# Altium PCB PCB1.pcbdoc (part 2 of 2)
Units mil, origin at the board's own origin, x right, y up, seen from the top; angles counter-clockwise.
Board outline 826.77 x 2007.87 mil, 4 copper layers (Top Layer, Inner1, Inner2, Bottom Layer), stack 62.447 mil thick; 60 components, 78 nets, 305 pads, 176 vias.
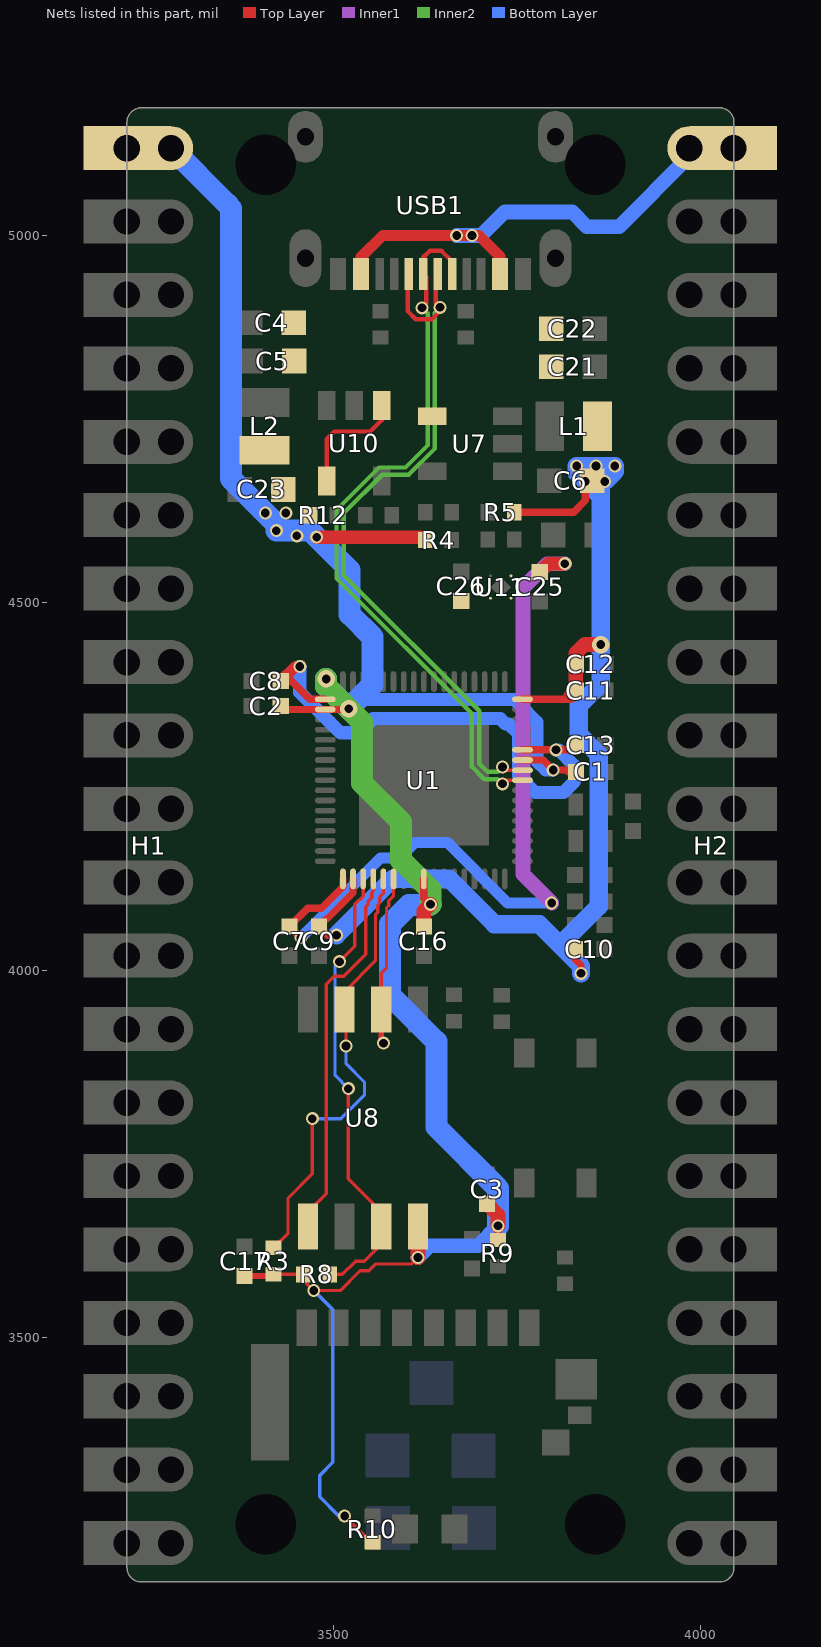
[diagram p4: the nets of this part, all layers, seen from the top]

## Via types
v1: diameter 17.7, hole 11.8, Top Layer to Bottom Layer, 172 vias
v2: diameter 24, hole 12, Top Layer to Bottom Layer, 3 vias
v3: diameter 17.7, hole 7.9, Top Layer to Bottom Layer, 1 vias

## Nets (pads, with @x,y where several pads share a name; then routed paths per layer and width w, separated by ;. In a path a pad name is that pad's centre, name@x,y a point inside that pad or via, vN(x,y) a via of type N, cw(c..) or ccw(c..) an arc to the next point about the centre after c; other vN are vias at no path point) (continued)
SPI0-HOLD: R8.2 U1.37 U8.7 | length 626.6
  Top Layer w4.5: R8.2@3495.5,3585.5 3512.5,3585.5 3530.5,3603.5 3542.5,3603.5 3565.5,3626.5 U8.7@3565.5,3650.86 3565.5,3670.5 3520.5,3715.5 v1(3520.5,3838.5) ; v1(3508.5,4011.5) 3529.5,4032.5 3529.5,4089.5 3540.82,4100.82 U1.37@3540.82,4124.19
  Bottom Layer w4.5: v1(3508.5,4011.5) 3502.5,4005.5 3502.5,3856.5 v1(3520.5,3838.5)
SPI0-MISO: U1.40 U8.2 | length 231.8
  Top Layer w4.5: U8.2@3565.5,3946.14 3565.5,3995.5 3572.5,4002.5 3572.5,4084.5 3575.5,4087.5 3575.5,4094.5 3582.16,4101.16 U1.40@3582.16,4124.19
  Top Layer w8: U8.2@3565.5,3946.14 3565.5,3903.5 v1(3568.5,3900.5)
SPI0-MOSI: U1.38 U8.5 | length 517.9
  Top Layer w4.5: U8.5@3465.5,3650.86 3465.5,3670.5 3490.5,3695.5 3490.5,3980.5 3501.5,3991.5 3514.5,3991.5 3544.5,4021.5 3544.5,4086.5 3547.5,4089.5 3547.5,4093.5 3552.5,4098.5 3552.5,4105.5 3554.6,4107.6 U1.38@3554.6,4124.19
SPI0-WP: R3.1 U1.39 U8.3 | length 610
  Top Layer w4.5: R3.1@3418.5,3621.5 3438.5,3641.49 3438.5,3689.5 3471.5,3722.5 v1(3471.5,3797.5) ; v1(3517.5,3896.5) 3517.5,3944.14 U8.3@3515.5,3946.14 3515.5,3970.5 3557.5,4012.5 3557.5,4075.5 3560.5,4078.5 3560.5,4088.5 3563.5,4091.5 3563.5,4099.5 3568.38,4104.38 U1.39@3568.38,4124.19
  Bottom Layer w4.5: v1(3471.5,3797.5) 3510.5,3797.5 3542.5,3829.5 3542.5,3847.5 3517.5,3872.5 v1(3517.5,3896.5)
USB-DM: U1.60 USB1.A7 USB1.B7 | length 996.3
  Top Layer w4.5: v1(3730.5,4253.5) 3735.5,4258.5 U1.60@3757.81,4258.5
  Top Layer w6: v1(3621,4902) 3626.5,4907.5 3626.5,4944.15 USB1.A7@3622.66,4947.99 3622.66,4970.65 3631.5,4979.5 3647.59,4979.5 3662.03,4964.98 USB1.B7@3662.03,4947.99
  Inner2 w6: v1(3621,4902) 3628.5,4894.5 3628.5,4714.5 3598.5,4684.5 3562.5,4684.5 3504.5,4626.5 3504.5,4533.36 3688.91,4348.95 3688.91,4276.95 3705.86,4260 3724,4260 v1(3730.5,4253.5)
USB-DP: U1.61 USB1.A6 USB1.B6 | length 999.7
  Top Layer w4.5: v1(3730.5,4276.5) 3734.72,4272.28 U1.61@3757.81,4272.28
  Top Layer w6: USB1.B6@3602.97,4947.99 3601.26,4946.28 3601.26,4897.74 3612.5,4886.5 3634.5,4886.5 3645.5,4897.5 v1(3645.5,4902.5) 3639.5,4908.5 3639.5,4945.15 USB1.A6@3642.34,4947.99
  Inner2 w6: v1(3645.5,4902.5) 3638.5,4895.5 3638.5,4710.36 3602.64,4674.5 3566.64,4674.5 3514.5,4622.36 3514.5,4537.5 3698.91,4353.09 3698.91,4281.09 3710,4270 3724,4270 v1(3730.5,4276.5)
VBUS: C4.2 C5.2 C21.2 C22.2 H2.20 U7.4 U10.1 U10.4 USB1.A4B9 USB1.B4A9 | length 811.6
  Top Layer w6: U10.4@3491.1,4666.31 3491.1,4723.1 3501.5,4733.5 3550.5,4733.5 3565.9,4748.9 U10.1@3565.9,4768.69
  Top Layer w15: USB1.B4A9@3538.01,4947.99 3538.01,4971.01 3567.5,5000.5 v1(3668.21,5000.5) v1(3688.98,5000.5) 3698.5,5000.5 3726.99,4972.02 USB1.A4B9@3726.99,4947.99
  Bottom Layer w20: v1(3668.21,5000.5) v1(3688.98,5000.5) 3701.5,5000.5 3733.5,5032.5 3825.5,5032.5 3845.5,5012.5 3889.5,5012.5 3985.21,5108.21 H2.20@3985.21,5119.5
VCC-1V8: C8.2 C13.2 U1.18 U1.63 | length 755.8
  Top Layer w10: C8.2@3428.51,4393.5 3443.5,4393.5 3468.26,4368.74 U1.18@3489.19,4368.74 ; U1.63@3757.81,4299.84 v1(3803.36,4299.84) 3828.56,4299.84 C13.2@3830.51,4301.78
  Top Layer w15: C8.2@3428.51,4393.5 3448.5,4413.49 v1(3454.51,4413.49)
  Bottom Layer w18: v1(3454.51,4413.49) 3454.51,4378.49 3509.77,4323.23 3535.23,4323.23 3554.5,4342.5 3727.5,4342.5 3735.03,4334.97 3739.34,4334.97 3752.5,4321.81 3752.5,4264.5 3775.22,4241.78 3813.5,4241.78 3828.5,4256.78 3828.5,4278.5 3807.16,4299.84 v1(3803.36,4299.84)
VCC-3V3: C1.2 C2.2 C3.1 C16.2 C17.2 C23.2 C26.2 H1.1 L2.2 R3.2 R4.2 R8.1 R9.2 R10.2 R12.2 U1.19 U1.43 U1.62 U8.8 U11.3 U11.4 | length 3492
  Top Layer w4.5: R3.2@3418.5,3585.5 R8.1@3459.5,3585.5 3459.5,3577.5 v1(3473.5,3563.5) 3509.5,3563.5 3536.5,3590.5 3548.5,3590.5 3557.5,3599.5 3606.5,3599.5 v1(3615.5,3608.5)
  Top Layer w5: v1(3515.5,3256.5) 3551.5,3220.5 R10.2@3553.5,3220.5
  Top Layer w8: C17.2@3379.22,3583.51 3416.51,3583.51 R3.2@3418.5,3585.5
  Top Layer w10: C2.2@3428.51,4359.5 3433.05,4354.96 U1.19@3489.19,4354.96 3520.08,4354.96 v2(3521.08,4355.96) ; U1.43@3623.5,4124.19 3623.5,4098.47 v1(3632.5,4089.47) ; R9.2@3724.4,3632.34 v1(3724.4,3651.5) ; U1.62@3757.81,4286.06 3785.94,4286.06 v1(3799.5,4272.5) 3817.5,4272.5 3820.22,4269.78 C1.2@3830.51,4269.78
  Top Layer w18: v1(3477.5,4589.5) 3621.49,4589.5 R4.2@3625.5,4585.5
  Top Layer w20: v1(3615.5,3608.5) U8.8@3615.5,3650.86 ; C16.2@3623.5,4059.51 3623.5,4080.47 v1(3632.5,4089.47) ; C3.1@3709.5,3681.51 3724.4,3666.6 v1(3724.4,3651.5)
  Inner2 w30: v2(3490.44,4396.5) 3490.44,4386.59 v2(3521.08,4355.96) 3539.5,4337.54 3539.5,4254.5 3592.5,4201.5 3592.5,4149.5 3632.5,4109.5 v1(3632.5,4089.47)
  Bottom Layer w5: v1(3473.5,3563.5) 3499.5,3537.5 3499.5,3329.5 3481.5,3311.5 3481.5,3282.5 3507.5,3256.5 v1(3515.5,3256.5)
  Bottom Layer w18: 3533.62,4368.5 3746.5,4368.5 3777.5,4337.5 3777.5,4284.5 3789.5,4272.5 v1(3799.5,4272.5)
  Bottom Layer w20: v1(3615.5,3608.5) 3631.5,3624.5 3697.4,3624.5 v1(3724.4,3651.5)
  Bottom Layer w30: H1.1@3279.03,5119.5 3279.5,5119.5 3356.5,5042.5 ; 3360.5,5037.5 3360.5,4669.5 v1(3407.5,4622.5) 3422.5,4607.5 v1(3422.5,4598.5) 3468.5,4598.5 v1(3477.5,4589.5) 3522.5,4544.5 3522.5,4484.5 3553.5,4453.5 3553.5,4388.38 3533.62,4368.5 v2(3521.08,4355.96) 3490.44,4386.59 v2(3490.44,4396.5) ; v1(3632.5,4089.47) 3631.53,4088.5 3603.5,4088.5 3577.5,4062.5 3577.5,3965.5 3640.5,3902.5 3640.5,3786.5 3724.4,3702.6 v1(3724.4,3651.5)
  other v1: 3450.5,4591.5 3435.5,4622.5
VCC-PSRAM: C7.2 C25.2 U1.35 U11.1 | length 1112
  Top Layer w10: v1(3455.93,4044.07) C7.2@3440.5,4059.51 3465.14,4084.15 3484.15,4084.15 3513.26,4113.26 U1.35@3513.26,4124.19
  Top Layer w18: C25.2@3781.28,4541.91 3792.87,4553.5 v1(3815.5,4553.5)
  Inner1 w20: v1(3797.5,4091.34) 3758.5,4130.34 3758.5,4520.5 3791.5,4553.5 v1(3815.5,4553.5)
  Bottom Layer w15: v1(3455.93,4044.07) 3564.36,4152.5 3590.5,4152.5 3611.5,4173.5 3655.5,4173.5 3737.66,4091.34 v1(3797.5,4091.34)
VDD-SYS: C6.2 C9.2 C10.2 C11.2 C12.2 L1.2 R5.2 U1.36 U1.68 | length 1734.8
  Top Layer w10: v1(3504.5,4047.5) 3492.51,4047.5 C9.2@3480.5,4059.51 3490.49,4069.5 3491.5,4069.5 3527.04,4105.04 U1.36@3527.04,4124.19 ; R5.2@3746.5,4623.5 3827.5,4623.5 3843.47,4639.47 v1(3843.47,4665.5) ; U1.68@3757.81,4368.74 3818.74,4368.74 C11.2@3823.49,4373.5 ; C10.2@3829.49,4028.5 3829.49,4014.36 3837.5,4006.35 v1(3837.5,3995.5)
  Top Layer w20: C11.2@3823.49,4373.5 C11.2@3830.49,4380.5 C12.2@3830.49,4416.5 3830.49,4431.49 3842.5,4443.5 v2@3864.5,4443.5
  Bottom Layer w25: v1(3504.5,4047.5) 3576.81,4119.81 ; 3579.5,4122.5 3581.5,4124.5 3657.5,4124.5 3719.5,4062.5 3780.46,4062.5 3807.46,4035.5 ; v1(3837.5,3995.5) 3837.5,4005.46 3807.46,4035.5 ; 3807.46,4035.5 3810.5,4035.5 3861.5,4086.5 3861.5,4293.5 3834.5,4320.5 3834.5,4360.5 3864.5,4390.5 v2(3864.5,4443.29) 3864.5,4644.47 ; v1(3843.47,4665.5) v1@3864.5,4665.5 ; v1(3843.47,4665.5) 3831.5,4677.47 v1(3831.5,4686.5) v1(3857.84,4686.5) v1(3883.55,4686.5) ; v1(3843.47,4665.5) 3864.5,4644.47 ; 3864.5,4644.47 v1@3864.5,4665.5 ; v1@3864.5,4665.5 v1(3869.81,4665.5) 3883.55,4679.24 v1(3883.55,4686.5) ; v1@3864.5,4665.5 3864.5,4667.45 v1(3883.55,4686.5)
pads on no net: SW1.2 SW1.3 USB1.14

## Polygon pours and split planes (outlines as drawn)
GND on Top Layer (solid, remove dead copper, pour order 2): 3016.5,5317.5 3016.5,3014.5 4253.5,3014.5 4253.5,5317.5
GND on Inner1 (solid, remove dead copper): 3021,5316 3021,3013 4258,3013 4258,5316
GND on Inner2 (solid, remove dead copper): 3008,5303 3008,3000 4245,3000 4245,5303
GND on Bottom Layer (solid, remove dead copper, pour order 2): 3000,5324 3000,3021 4237,3021 4237,5324

## Keep-outs
Board Outline Layer:
  the board outline again, w1

## Other copper
Top Layer:
  drawing of 308 lines, arcs and shapes, not listed
Inner1:
  region net SPI0-CS0: 3864.97,3855.2 3861.44,3858.73 3861.86,3859.66 3862.29,3861.41 3862.66,3863.65 3862.89,3866.04 3872.28,3856.65 3869.9,3856.42 3867.65,3856.05 3865.9,3855.62
  region net SPI0-CS0: 3566.18,3883.57 3566.18,3878.57 3565.22,3878.21 3563.68,3877.27 3561.84,3875.95 3559.98,3874.43 3559.98,3887.7 3561.84,3886.19 3563.68,3884.86 3565.22,3883.92
Inner2:
  region net PE3: 3306.49,3349.79 3309.32,3346.97 3308.34,3345.72 3307.62,3344.24 3307.12,3342.55 3306.81,3340.7 3306.68,3338.71 3306.7,3336.62 3307.06,3332.26 3308.34,3323.84 3308.85,3320.32 3308.97,3317.62 3277.15,3349.44 3279.85,3349.32 3283.37,3348.82 3291.79,3347.53 3296.14,3347.17 3298.24,3347.15 3300.23,3347.29 3302.08,3347.59 3303.77,3348.09 3305.25,3348.82
  region net PE2: 3306.49,3449.79 3309.32,3446.97 3308.34,3445.72 3307.62,3444.24 3307.12,3442.55 3306.81,3440.7 3306.68,3438.71 3306.7,3436.62 3307.06,3432.26 3308.34,3423.84 3308.85,3420.32 3308.97,3417.62 3277.15,3449.44 3279.85,3449.32 3283.37,3448.82 3291.79,3447.53 3296.14,3447.17 3298.24,3447.15 3300.23,3447.29 3302.08,3447.59 3303.77,3448.09 3305.25,3448.82
  region net PD6: 3310.23,5002.59 3316.01,4991.16 3315.43,4991.56 3314.57,4991.89 3312.08,4992.37 3308.73,4992.59 3304.69,4992.58 3300.15,4992.32 3295.29,4991.83 3290.29,4991.11 3285.32,4990.17 3307.35,5029.41 3307.61,5028.33 3307.74,5027.04 3307.71,5023.9 3307.23,5016.32 3307.18,5012.35 3307.53,5008.57 3307.91,5006.84 3308.48,5005.24 3309.24,5003.82
  region net PD7: 3310.26,4908.57 3320.54,4892.63 3319.69,4893.3 3318.59,4893.86 3317.27,4894.32 3315.74,4894.67 3312.16,4895.09 3308.03,4895.12 3303.53,4894.76 3298.85,4894.02 3294.16,4892.91 3289.65,4891.44 3305.54,4933.54 3305.92,4932.59 3306.18,4931.42 3306.44,4928.58 3306.56,4921.6 3306.78,4917.9 3307.35,4914.34 3307.82,4912.69 3308.45,4911.16 3309.26,4909.78
  region net PD16: 3300.09,4176.09 3281.16,4188.66 3279.97,4189.7 3278.66,4190.59 3275.76,4192 3272.62,4193.03 3269.42,4193.79 3263.54,4195.02 3261.21,4195.75 3260.27,4196.2 3259.51,4196.72 3304.07,4202.99 3301.97,4199.33 3300.28,4195.44 3299.02,4191.48 3298.23,4187.6 3297.91,4183.97 3298.1,4180.73 3298.39,4179.31 3298.82,4178.05 3299.39,4176.97
  region net PD17: 3282.27,4150.45 3302.59,4164.41 3301.73,4163.37 3301.01,4162.13 3300.42,4160.7 3299.97,4159.11 3299.46,4155.54 3299.48,4151.58 3300.01,4147.41 3301.04,4143.18 3302.55,4139.08 3303.49,4137.13 3304.54,4135.28 3260.19,4142.84 3260.97,4143.35 3261.93,4143.77 3264.33,4144.44 3270.37,4145.52 3273.63,4146.21 3276.83,4147.17 3278.34,4147.8 3279.77,4148.54 3281.09,4149.42
  region net PE4: 3306.49,3249.79 3309.32,3246.97 3308.34,3245.72 3307.62,3244.24 3307.12,3242.55 3306.81,3240.7 3306.68,3238.71 3306.7,3236.62 3307.06,3232.26 3308.34,3223.84 3308.85,3220.32 3308.97,3217.62 3277.15,3249.44 3279.85,3249.32 3283.37,3248.82 3291.79,3247.53 3296.14,3247.17 3298.24,3247.15 3300.23,3247.29 3302.08,3247.59 3303.77,3248.09 3305.25,3248.82
  region net PD5: 3940.9,4893.72 3954.01,4913.19 3955.03,4914.38 3955.88,4915.73 3956.57,4917.2 3957.14,4918.77 3957.94,4922.1 3958.43,4925.55 3959.13,4931.96 3959.64,4934.54 3960,4935.59 3960.45,4936.44 3971.5,4892.82 3967.4,4894.59 3963.02,4895.9 3958.54,4896.74 3954.14,4897.11 3949.99,4896.99 3946.28,4896.4 3944.65,4895.91 3943.2,4895.31 3941.94,4894.57
  region net PE10: 3954.24,3242.58 3953.89,3249.3 3954.76,3249.1 3956.8,3248.97 3963.68,3248.89 3973.13,3249.06 3983.75,3249.46 3955.67,3214.31 3955.57,3216.88 3955.87,3220.24 3956.81,3228.31 3957.04,3232.49 3957.01,3234.51 3956.83,3236.44 3956.49,3238.24 3955.97,3239.89 3955.22,3241.34
  region net PE9: 3945.91,3315.25 3942.91,3319.75 3949.59,3326.27 3963.91,3340.63 3966.91,3295.73 3965.05,3297.57 3962.9,3300.25 3957.86,3306.8 3955.05,3310 3953.59,3311.43 3952.1,3312.69 3950.58,3313.75 3949.04,3314.55 3947.49,3315.07
  region net PE8: 3953.84,3428.98 3942.99,3446.19 3943.89,3445.47 3945.04,3444.85 3946.41,3444.34 3947.96,3443.94 3951.58,3443.46 3955.7,3443.39 3960.15,3443.74 3964.76,3444.49 3969.33,3445.65 3973.69,3447.2 3959.17,3404.61 3958.77,3405.53 3958.48,3406.65 3958.13,3409.41 3957.81,3416.19 3957.49,3419.8 3956.83,3423.27 3956.33,3424.89 3955.67,3426.4 3954.85,3427.77
  region net PE7: 3944.37,3517.25 3944.37,3521.75 3945.94,3521.93 3947.51,3522.46 3949.05,3523.29 3950.58,3524.37 3952.08,3525.67 3953.55,3527.14 3956.38,3530.43 3961.42,3537.21 3963.56,3540.02 3965.37,3542 3965.37,3497 3963.56,3498.98 3961.42,3501.79 3956.38,3508.57 3953.55,3511.86 3952.08,3513.33 3950.58,3514.63 3949.05,3515.71 3947.51,3516.54 3945.94,3517.07
  region net PE6: 3948.22,3591.04 3953.82,3603.01 3954.82,3604.23 3955.59,3605.65 3956.16,3607.23 3956.57,3608.95 3956.95,3612.69 3956.94,3616.63 3956.54,3624.13 3956.55,3627.23 3956.69,3628.51 3956.96,3629.57 3978.75,3590.2 3973.85,3591.15 3968.9,3591.87 3964.08,3592.35 3959.57,3592.59 3955.55,3592.58 3952.2,3592.33 3949.7,3591.81 3948.82,3591.46
  region net PE5: 3957.92,3689.03 3954.74,3692.21 3955.72,3693.45 3956.46,3694.93 3956.97,3696.61 3957.28,3698.45 3957.42,3700.43 3957.42,3702.51 3957.1,3706.84 3955.87,3715.2 3955.39,3718.7 3955.27,3721.38 3987.09,3689.56 3984.41,3689.67 3980.91,3690.16 3972.55,3691.38 3968.23,3691.71 3966.15,3691.71 3964.17,3691.57 3962.32,3691.25 3960.64,3690.74 3959.17,3690.01
  region net GPADC: 3953.14,3847.01 3962.08,3852.2 3963.3,3851.2 3964.72,3850.4 3966.3,3849.78 3968.02,3849.33 3971.75,3848.84 3975.69,3848.76 3983.25,3849.18 3986.41,3849.35 3988.85,3849.28 3955.21,3819.39 3955.01,3828.97 3954.53,3837.63 3953.87,3844.08 3953.51,3846.06
  region net PB3: 3954.92,3946.97 3957.75,3949.79 3958.99,3948.82 3960.47,3948.09 3962.16,3947.59 3964.01,3947.29 3966.01,3947.15 3968.1,3947.17 3972.45,3947.53 3980.87,3948.82 3984.39,3949.32 3987.09,3949.44 3955.27,3917.62 3955.4,3920.32 3955.9,3923.84 3957.19,3932.26 3957.54,3936.62 3957.56,3938.71 3957.43,3940.7 3957.13,3942.55 3956.62,3944.24 3955.9,3945.72
  region net PD4: 3942.28,4793.1 3953.89,4811.07 3954.9,4812.27 3955.73,4813.63 3956.4,4815.13 3956.92,4816.73 3957.62,4820.16 3958,4823.72 3958.44,4830.38 3958.84,4833.08 3959.15,4834.18 3959.57,4835.08 3972.97,4792.11 3968.69,4793.74 3964.17,4794.95 3959.61,4795.74 3955.17,4796.09 3951.04,4796.01 3947.39,4795.49 3945.81,4795.06 3944.41,4794.52 3943.23,4793.87
  region net PD3: 3938.93,4694.74 3954.28,4716.46 3955.31,4717.65 3956.19,4718.96 3956.94,4720.39 3957.57,4721.9 3958.55,4725.08 3959.25,4728.34 3960.36,4734.34 3961.04,4736.73 3961.46,4737.69 3961.97,4738.47 3969.3,4694.07 3967.45,4695.12 3965.48,4696.04 3961.32,4697.49 3956.98,4698.4 3952.65,4698.76 3948.5,4698.58 3946.55,4698.29 3944.71,4697.86 3943,4697.29 3941.46,4696.58 3940.09,4695.73
  region net USB-DM: 3721.88,4257.88 3726.12,4262.12 3726.56,4261.86 3727.15,4261.76 3728.57,4261.9 3730,4262.19 3731.05,4262.33 3721.67,4252.95 3721.81,4254 3722.1,4255.43 3722.24,4256.85 3722.14,4257.44
  region net USB-DP: 3726.12,4267.88 3721.88,4272.12 3722.14,4272.56 3722.24,4273.15 3722.1,4274.57 3721.81,4276 3721.67,4277.05 3731.05,4267.67 3730,4267.81 3728.57,4268.1 3727.15,4268.24 3726.56,4268.14
  region net PA0: 3719.5,4141.45 3713.5,4141.45 3713.19,4142.57 3712.36,4144.16 3711.2,4145.95 3709.86,4147.65 3723.14,4147.65 3721.8,4145.95 3720.64,4144.16 3719.81,4142.57
  region net PA2: 3737.62,4168.62 3733.38,4164.38 3732.86,4164.72 3732.2,4164.9 3730.64,4164.93 3727.95,4164.67 3737.33,4174.05 3737.07,4171.36 3737.1,4169.8 3737.28,4169.14
  region net GPADC: 3802.55,4149.5 3802.55,4139.5 3800.8,4139.36 3798.99,4138.99 3797.41,4138.46 3796.35,4137.86 3796.35,4151.14 3797.41,4150.54 3798.99,4150.01 3800.8,4149.64
  region net HPOUT: 3741.85,4211.81 3736.19,4206.15 3735.02,4207.01 3733.39,4207.79 3731.6,4208.38 3729.95,4208.67 3739.33,4218.05 3739.62,4216.4 3740.21,4214.61 3740.99,4212.98
  region net PD17: 3503.37,4447.81 3507.87,4440.03 3508.07,4438.19 3508.53,4436.47 3509.01,4434.98 3509.29,4433.83 3498.84,4441.61 3499.69,4441.89 3500.5,4442.38 3501.27,4443.06 3501.95,4443.87 3502.53,4444.79 3502.98,4445.77 3503.27,4446.79
  region net PD16: 3515.25,4439.77 3519.75,4448 3519.85,4446.95 3520.14,4445.91 3520.58,4444.91 3521.16,4443.99 3521.84,4443.18 3522.61,4442.52 3523.42,4442.05 3524.26,4441.8 3514.12,4433.57 3514.32,4434.72 3514.71,4436.21 3515.08,4437.93
  region net PE2: 3434.45,4248.5 3434.45,4252.5 3435.25,4252.9 3436.74,4253.95 3440.65,4257.14 3440.65,4243.86 3436.74,4247.05 3435.25,4248.1
  region net PE3: 3434.74,4225.5 3436.24,4229.5 3442.43,4233.76 3440.93,4220.57 3439.15,4222.38 3437.33,4223.96 3435.76,4225.08
  region net PE4: 3510.91,4231.09 3508.09,4233.91 3508.39,4234.46 3508.49,4235.18 3508.28,4236.95 3507.86,4238.74 3507.67,4240.05 3517.05,4230.67 3515.74,4230.86 3513.95,4231.28 3512.18,4231.49 3511.46,4231.39
  region net PE5: 3460.55,4192.75 3460.55,4188.25 3459.67,4187.87 3458.16,4186.88 3454.35,4183.86 3454.35,4197.14 3458.16,4194.12 3459.67,4193.13
  region net PE6: 3528.5,4198.75 3528.5,4194.25 3528.04,4194.09 3527.59,4193.66 3526.76,4192.32 3526.01,4190.85 3525.35,4189.86 3525.35,4203.14 3526.01,4202.15 3526.76,4200.68 3527.59,4199.34 3528.04,4198.91
  region net PE7: 3461.55,4167.75 3461.55,4163.25 3460.67,4162.87 3459.16,4161.88 3455.35,4158.86 3455.35,4172.14 3459.16,4169.12 3460.67,4168.13
  region net PE8: 3521.75,4146.45 3517.25,4146.45 3516.87,4147.33 3515.88,4148.84 3512.86,4152.65 3526.14,4152.65 3523.12,4148.84 3522.13,4147.33
  region net PE9: 3460.89,4135.29 3460.71,4129.11 3460.15,4129.51 3459.37,4129.84 3457.36,4130.25 3455.04,4130.3 3452.8,4129.95 3458.69,4141.85 3459.01,4140.53 3459.33,4138.74 3459.88,4136.87 3460.32,4136.02
  region net PE10: 3459.5,4113.75 3459.5,4109.25 3459.04,4109.09 3458.59,4108.66 3457.76,4107.32 3457.01,4105.85 3456.35,4104.86 3456.35,4118.14 3457.01,4117.15 3457.76,4115.68 3458.59,4114.34 3459.04,4113.91
  region net PD7: 3413.45,4550.5 3413.45,4554.5 3414.25,4554.9 3415.74,4555.95 3419.65,4559.14 3419.65,4545.86 3415.74,4549.05 3414.25,4550.1
  region net SDC0_DC: 3648.14,4146.1 3643.9,4141.86 3642.89,4142.43 3641.18,4142.97 3639.09,4143.42 3636.95,4143.67 3646.33,4153.05 3646.58,4150.91 3647.03,4148.82 3647.57,4147.11
  region net PD6: 3395.57,4577.61 3398.39,4580.43 3399.24,4580.15 3401.04,4579.84 3406.05,4579.33 3396.67,4569.95 3396.16,4574.96 3395.85,4576.76
  region net PD4: 3673.91,4478.09 3677.09,4474.91 3676.78,4474.37 3676.66,4473.66 3676.81,4471.94 3677.17,4470.22 3677.33,4468.95 3667.95,4478.33 3669.22,4478.17 3670.95,4477.81 3672.66,4477.66 3673.37,4477.78
  region net PD3: 3694.43,4458.61 3697.61,4455.43 3697.26,4454.54 3696.89,4452.77 3696.33,4447.95 3686.95,4457.33 3691.77,4457.89 3693.54,4458.26
  region net PB3: 3735.76,4321.7 3738.58,4318.88 3738.33,4318.38 3738.28,4317.71 3738.61,4316.03 3739.1,4314.32 3739.33,4313.07 3729.95,4322.45 3731.2,4322.22 3732.91,4321.73 3734.59,4321.4 3735.26,4321.45
  region net SDC0_DC: 3803.45,3626.5 3803.45,3632.5 3804.57,3632.81 3806.16,3633.64 3807.95,3634.8 3809.65,3636.14 3809.65,3622.86 3807.95,3624.2 3806.16,3625.36 3804.57,3626.19
  region net VCC-3V3: 3506.99,4391.26 3486.48,4369.35 3486.16,4369.91 3486.06,4370.67 3486.42,4372.7 3487.29,4375.15 3488.39,4377.76 3489.46,4380.27 3490.23,4382.41 3490.41,4383.26 3490.42,4383.91 3490.22,4384.35 3489.77,4384.52 3502.29,4398.44 3502.83,4396.99 3503.94,4395.08 3505.4,4393.06
  region net PA0: 3850.5,3666.55 3856.5,3666.55 3856.81,3665.43 3857.64,3663.84 3858.8,3662.05 3860.14,3660.35 3846.86,3660.35 3848.2,3662.05 3849.36,3663.84 3850.19,3665.43
  region net PA2: 3869.86,3664.9 3874.1,3669.14 3875.11,3668.57 3876.82,3668.03 3878.91,3667.58 3881.05,3667.33 3871.67,3657.95 3871.42,3660.09 3870.97,3662.18 3870.43,3663.89
  region net HPOUT: 3864.55,3622.5 3864.55,3614.5 3863.12,3614.27 3861.41,3613.68 3859.73,3612.83 3858.35,3611.86 3858.35,3625.14 3859.73,3624.17 3861.41,3623.32 3863.12,3622.73
  region net GND: 3699.69,4239.33 3694.03,4233.67 3693.41,4233.97 3692.27,4234.26 3689.3,4234.67 3698.69,4244.05 3699.1,4241.09 3699.39,4239.94
  region net GND: 3701.91,4217.5 3701.91,4209.5 3700.47,4209.27 3698.77,4208.68 3697.09,4207.83 3695.71,4206.86 3695.71,4220.14 3697.09,4219.17 3698.77,4218.32 3700.47,4217.73
  region net GND: 3850.55,3639.5 3850.55,3631.5 3849.12,3631.27 3847.41,3630.68 3845.73,3629.83 3844.35,3628.86 3844.35,3642.14 3845.73,3641.17 3847.41,3640.32 3849.12,3639.73
  region net GND: 3929.15,3709.19 3934.81,3714.85 3935.98,3713.99 3937.61,3713.21 3939.4,3712.62 3941.05,3712.33 3931.67,3702.95 3931.38,3704.6 3930.79,3706.39 3930.01,3708.02
  region net USB-DM: 3630.62,4896.62 3626.38,4892.38 3624.36,4892.79 3620.45,4893.17 3629.83,4902.55 3630.21,4898.64
  region net USB-DP: 3640.62,4893.38 3636.38,4897.62 3636.72,4898.14 3636.9,4898.8 3636.93,4900.36 3636.67,4903.05 3646.05,4893.67 3643.36,4893.93 3641.8,4893.9 3641.14,4893.72
  region net PD5: 3629.35,4517.83 3621.67,4519.15 3620.17,4520.23 3618.48,4520.97 3616.92,4521.52 3615.78,4522.01 3628.52,4525.75 3628.17,4524.78 3627.95,4523.71 3627.93,4521.46 3628.41,4519.38 3628.83,4518.51
Bottom Layer:
  region net VCC-3V3: 3318.57,5101.64 3297.71,5080.07 3295.8,5081.74 3293.48,5083.38 3290.86,5084.94 3288.06,5086.36 3285.21,5087.59 3282.41,5088.56 3279.8,5089.23 3277.48,5089.54 3308.95,5121.71 3309.3,5119.41 3310.01,5116.81 3311.02,5114.04 3312.27,5111.21 3313.7,5108.44 3315.27,5105.84 3316.91,5103.53
  region net PB1: 3982.71,4153.79 3987.71,4153.79 3987.9,4152.71 3988.44,4151.66 3989.28,4150.62 3990.38,4149.61 3993.18,4147.65 3996.49,4145.79 4003.21,4142.35 4005.92,4140.79 4006.95,4140.05 4007.71,4139.34 3962.71,4139.34 3963.48,4140.05 3964.51,4140.79 3967.22,4142.35 3973.94,4145.79 3977.25,4147.65 3980.05,4149.61 3981.15,4150.62 3981.99,4151.66 3982.53,4152.71
  region net PB0: 3982.71,4253.79 3987.71,4253.79 3987.9,4252.71 3988.44,4251.66 3989.28,4250.62 3990.38,4249.61 3993.18,4247.65 3996.49,4245.79 4003.21,4242.35 4005.92,4240.79 4006.95,4240.05 4007.71,4239.34 3962.71,4239.34 3963.48,4240.05 3964.51,4240.79 3967.22,4242.35 3973.94,4245.79 3977.25,4247.65 3980.05,4249.61 3981.15,4250.62 3981.99,4251.66 3982.53,4252.71
  region net VBUS: 3973.79,5082.64 3951.18,5088.32 3952.63,5090.23 3953.89,5092.78 3954.92,5095.82 3955.71,5099.22 3956.23,5102.81 3956.44,5106.46 3956.33,5110.02 3955.85,5113.35 3994.99,5091.14 3987.71,5088.53 3981.09,5085.98 3976.12,5083.88
  region net PA0: 3540.79,3367.53 3545.03,3371.77 3547.96,3370.03 3551.19,3368.95 3554.58,3368.59 3543.97,3357.98 3543.61,3361.37 3542.53,3364.6 3540.79,3367.53
  region net PA1: 3716.5,3377.44 3722.5,3377.44 3721.52,3372.98 3721.2,3368.44 3712,3368.44 3713.89,3370.23 3715.31,3372.41 3716.2,3374.85 3716.5,3377.44
  region net PA2: 3603.6,3273.08 3607.84,3268.84 3606.1,3265.91 3605.02,3262.68 3604.66,3259.29 3594.05,3269.9 3597.44,3270.27 3600.67,3271.34 3603.6,3273.08
  region net PA3: 3720.91,3273.4 3725.15,3269.16 3723.41,3266.23 3722.34,3263 3721.97,3259.61 3711.37,3270.22 3714.75,3270.58 3717.98,3271.66 3720.91,3273.4
  region net HPOUT: 3662.51,3470.62 3666.75,3466.38 3665.06,3463.47 3664.01,3460.27 3663.66,3456.92 3653.05,3467.53 3656.4,3467.88 3659.6,3468.93 3662.51,3470.62
  region net SPI0-HOLD: 3504.75,3996.48 3500.25,4005.5 3500.15,4007.34 3499.94,4009.06 3499.65,4011.7 3509.22,4002.68 3508.38,4002.48 3507.58,4002.04 3506.82,4001.41 3506.15,4000.61 3505.57,3999.68 3505.13,3998.66 3504.85,3997.58
  region net SDC0_CLK: 3670.45,3689.25 3670.45,3693.75 3671.33,3694.13 3672.84,3695.12 3676.65,3698.14 3676.65,3684.86 3672.84,3687.88 3671.33,3688.87
  region net SDC0_CLK: 3591.25,3562.55 3595.75,3562.55 3596.13,3561.67 3597.12,3560.16 3600.14,3556.35 3586.86,3556.35 3589.88,3560.16 3590.87,3561.67
  region net VCC-PSRAM: 3458.14,4056.89 3468.74,4046.28 3466.67,4043.9 3464.91,4041.49 3463.43,4039.35 3462.19,4037.82 3449.67,4050.33 3451.21,4051.57 3453.35,4053.05 3455.76,4054.81
  region net SPI0-HOLD: 3510.39,3845.43 3513.57,3848.61 3514.46,3848.26 3516.23,3847.89 3521.05,3847.33 3511.67,3837.95 3511.11,3842.77 3510.74,3844.54
  region net SPI0-WP: 3519.75,3884.45 3515.25,3884.45 3514.87,3885.33 3513.88,3886.84 3510.86,3890.65 3524.14,3890.65 3521.12,3886.84 3520.13,3885.33
  region net SPI0-WP: 3483.55,3799.75 3483.55,3795.25 3482.67,3794.87 3481.16,3793.88 3477.35,3790.86 3477.35,3804.14 3481.16,3801.12 3482.67,3800.13
  region net VCC-3V3: 3437.3,4583.5 3436.3,4613.5 3436.76,4613.26 3437.22,4612.57 3438.09,4610.16 3438.92,4606.82 3439.71,4603.09 3440.47,4599.52 3441.19,4596.66 3441.86,4595.07 3442.19,4594.92 3442.5,4595.28 3443.5,4586.09 3443.1,4586.28 3442.53,4586.13 3441.02,4585.19 3439.2,4584.05 3438.25,4583.65
  region net VCC-3V3: 3464.7,4613.5 3463.7,4583.5 3462.75,4583.65 3461.8,4584.05 3459.98,4585.19 3458.47,4586.13 3457.9,4586.28 3457.5,4586.09 3458.5,4595.28 3458.81,4594.92 3459.14,4595.07 3459.81,4596.66 3460.53,4599.52 3461.29,4603.09 3462.08,4606.82 3462.91,4610.16 3463.78,4612.57 3464.24,4613.26
  region net VDD-SYS: 3866.93,4687.56 3883.03,4668.3 3881.62,4667.07 3880.21,4665.97 3879.08,4664.97 3878.72,4664.49 3878.54,4664.03 3871.55,4674.18 3871.94,4674.22 3872.08,4674.52 3871.76,4675.79 3869.63,4680 3868.36,4682.41 3867.31,4684.65 3866.74,4686.46 3866.73,4687.11
  region net VCC-1V8: 3820.47,4299.26 3806.31,4287.96 3805.13,4288.97 3803.67,4289.98 3802.18,4290.82 3800.92,4291.33 3812.21,4299.76 3812.28,4299.5 3812.49,4299.33 3813.25,4299.23 3815.68,4299.54 3818.44,4299.84 3819.61,4299.71
  region net VCC-3V3: 3506.99,4391.26 3486.48,4369.35 3486.16,4369.91 3486.06,4370.67 3486.42,4372.7 3487.29,4375.15 3488.39,4377.76 3489.46,4380.27 3490.23,4382.41 3490.41,4383.26 3490.42,4383.91 3490.22,4384.35 3489.77,4384.52 3502.29,4398.44 3502.83,4396.99 3503.94,4395.08 3505.4,4393.06
  region net PA1: 3824.5,3938.45 3818.5,3938.45 3818.19,3939.57 3817.36,3941.16 3816.2,3942.95 3814.86,3944.65 3828.14,3944.65 3826.8,3942.95 3825.64,3941.16 3824.81,3939.57
  region net PA3: 3844.5,3919.45 3838.5,3919.45 3838.19,3920.57 3837.36,3922.16 3836.2,3923.95 3834.86,3925.65 3848.14,3925.65 3846.8,3923.95 3845.64,3922.16 3844.81,3920.57
  region net PA0: 3841.45,3651.5 3841.45,3657.5 3842.57,3657.81 3844.16,3658.64 3845.95,3659.8 3847.65,3661.14 3847.65,3647.86 3845.95,3649.2 3844.16,3650.36 3842.57,3651.19
  region net PA2: 3883.5,3646.45 3877.5,3646.45 3877.19,3647.57 3876.36,3649.16 3875.2,3650.95 3873.86,3652.65 3887.14,3652.65 3885.8,3650.95 3884.64,3649.16 3883.81,3647.57
  region net HPOUT: 3846.1,3607.86 3841.86,3612.1 3842.43,3613.11 3842.97,3614.82 3843.42,3616.91 3843.67,3619.05 3853.05,3609.67 3850.91,3609.42 3848.82,3608.97 3847.11,3608.43
  region net GND: 3691.1,3436.86 3686.86,3441.1 3687.43,3442.11 3687.97,3443.82 3688.42,3445.91 3688.67,3448.05 3698.05,3438.67 3695.91,3438.42 3693.82,3437.97 3692.11,3437.43
  region net GND: 3708.44,3456.97 3708.4,3448.45 3705.11,3442.98 3701.04,3455.61 3701.89,3455.34 3702.86,3455.21 3704.93,3455.35 3706.9,3455.96 3707.75,3456.42
  region net GND: 3580.9,3473.14 3585.14,3468.9 3584.57,3467.89 3584.03,3466.18 3583.58,3464.09 3583.33,3461.95 3573.95,3471.33 3576.09,3471.58 3578.18,3472.03 3579.89,3472.57
  region net GND: 3585.14,3456.1 3580.9,3451.86 3579.89,3452.43 3578.18,3452.97 3576.09,3453.42 3573.95,3453.67 3583.33,3463.05 3583.58,3460.91 3584.03,3458.82 3584.57,3457.11
  region net GND: 3698.63,4238.27 3695.09,4234.73 3694.56,4235.06 3693.87,4235.19 3692.2,4235.1 3690.53,4234.81 3689.3,4234.67 3698.69,4244.05 3698.55,4242.82 3698.26,4241.16 3698.16,4239.49 3698.3,4238.8
  region net GND: 3692.36,4174.45 3687.36,4174.45 3687,4175.41 3686.06,4176.95 3684.74,4178.79 3683.22,4180.65 3696.5,4180.65 3694.98,4178.79 3693.65,4176.95 3692.71,4175.41
  region net GND: 3696.61,4196.79 3700.15,4193.25 3699.72,4192.33 3699.29,4190.57 3698.93,4188.33 3698.69,4185.95 3689.3,4195.33 3691.69,4195.57 3693.93,4195.93 3695.68,4196.36
  region net GND: 3841.6,3625.06 3830.39,3622.34 3831.14,3623.21 3831.77,3624.16 3832.58,3626.15 3832.76,3627.1 3832.75,3627.97 3832.57,3628.71 3832.19,3629.29 3845.43,3629.99 3843.88,3627.82 3842.83,3626.44
  region net GND: 3851.73,3637.5 3849.76,3631.5 3848.8,3631.22 3847.25,3630.48 3843.57,3628.24 3845.54,3640.87 3846.79,3639.63 3848.44,3638.55 3850.18,3637.79
  region net PB1: 3604.55,4869 3604.55,4864 3603.59,4863.64 3602.05,4862.71 3600.21,4861.38 3598.35,4859.86 3598.35,4873.14 3600.21,4871.62 3602.05,4870.29 3603.59,4869.36
  region net PB0: 3729.06,4882.63 3722.51,4877.63 3720.67,4877.38 3718.95,4876.83 3716.31,4875.84 3722.87,4887.38 3723.28,4886.49 3723.86,4885.63 3725.42,4884.11 3727.25,4883.04 3728.18,4882.73
  region net $1N238: 3712.5,4650.45 3702.5,4650.45 3702.36,4652.2 3701.99,4654.01 3701.46,4655.59 3700.86,4656.65 3714.14,4656.65 3713.54,4655.59 3713.01,4654.01 3712.64,4652.2
  region net $1N238: 3690.48,4597.55 3697.56,4590.48 3696.42,4589.14 3695.4,4587.6 3694.65,4586.11 3694.33,4584.94 3684.95,4594.33 3686.12,4594.65 3687.6,4595.39 3689.15,4596.41
  region net VCC-3V3: 3505.17,3255.3 3502.68,3264.86 3503.5,3264.17 3504.44,3263.61 3505.45,3263.19 3506.49,3262.92 3507.51,3262.8 3508.47,3262.85 3509.33,3263.07 3510.05,3263.47 3509.06,3250.43 3507.45,3252.55 3506.4,3253.92
  region net VCC-3V3: 3483.79,3556.75 3480.25,3553.21 3479.33,3553.64 3477.57,3554.07 3475.33,3554.43 3472.95,3554.67 3482.33,3564.05 3482.57,3561.67 3482.93,3559.43 3483.36,3557.67
  region net VCC-PSRAM: 3786.88,4083.84 3786.88,4098.84 3790.03,4099.05 3792.98,4099.51 3795.53,4099.98 3797.5,4100.19 3797.5,4082.49 3795.53,4082.7 3792.98,4083.16 3790.03,4083.63
  region net GND: 3814.45,4169 3814.45,4174 3815.41,4174.36 3816.95,4175.29 3818.79,4176.62 3820.65,4178.14 3820.65,4164.86 3818.79,4166.38 3816.95,4167.71 3815.41,4168.64
  region net GND: 3816.21,4178.25 3819.75,4181.79 3820.67,4181.36 3822.43,4180.93 3824.67,4180.57 3827.05,4180.33 3817.67,4170.95 3817.43,4173.33 3817.07,4175.57 3816.64,4177.33
  region net VCC-3V3: 3704.47,3617.43 3690.33,3631.57 3699.96,3641.37 3709.4,3651.35 3724.25,3636.5 3714.28,3627.05 3704.47,3617.43
  region net VDD-SYS: 3852.66,4095.34 3847.07,4090.21 3841.06,4085.57 3834.68,4081.47 3827.97,4077.92 3820.99,4074.96 3813.77,4072.6 3806.39,4070.87 3798.88,4069.78 3791.3,4069.33 3807.46,4035.5 3844.33,4016.3 3844.78,4023.88 3845.87,4031.39 3847.6,4038.77 3849.96,4045.99 3852.92,4052.97 3856.47,4059.68 3860.57,4066.06 3865.21,4072.07 3870.34,4077.66 3852.66,4095.34
  region net GND: 3777.93,4208.61 3782.67,4204.43 3787.9,4200.87 3793.54,4198 3787.5,4195.5 3776.46,4198 3775.68,4200.94 3774.46,4203.73 3772.84,4206.3 3770.86,4208.61 3777.93,4208.61

## Silkscreen, mask and mechanical layers (free items; w line width, h text height)
Top Silkscreen Layer:
  text "5V" at 3948.5,5094.5 h40 r90
  text "3V3" at 3354.5,5083.5 h40 r90
  text "D6" at 3354.5,4997.5 h40 r90
  text "GND" at 3948.5,4981.5 h40 r90
  text "USB" at 3420.5,4925.5 h60 r90
  text "V1.5" at 3900.5,4921.5 h60 r90
  text "D7" at 3354.5,4899.05 h40 r90
  text "D5" at 3948.5,4898.05 h40 r90
  text "D8" at 3354.5,4797.6 h40 r90
  text "D4" at 3948.5,4796.6 h40 r90
  text "D9" at 3354.5,4697.6 h40 r90
  text "D3" at 3948.5,4696.6 h40 r90
  text "D2" at 3948.5,4593.78 h40 r90
  text "D12" at 3354.5,4586.78 h40 r90
  text "D1" at 3948.5,4498.6 h40 r90
  text "D13" at 3354.5,4493.6 h40 r90
  text "D0" at 3948.5,4394.5 h40 r90
  text "D14" at 3354.5,4388.6 h40 r90
  text "D15" at 3354.5,4287.6 h40 r90
  text "D22" at 3948.5,4286.6 h40 r90
  text "B0" at 3957.5,4197.5 h40 r90
  text "D16" at 3354.5,4185.6 h40 r90
  text "B1" at 3948.5,4099.6 h40 r90
  text "D17" at 3354.5,4088.6 h40 r90
  text "F101" at 3650.5,4051.5 h60
  text "B2" at 3948.5,3997.6 h40 r90
  text "D18" at 3354.5,3988.6 h40 r90
  text "B3" at 3948.5,3895.67 h40 r90
  text "D19" at 3354.5,3888.67 h40 r90
  text "D20" at 3354.5,3788.42 h40 r90
  text "ADC" at 3948.5,3779.42 h40 r90
  text "FEL" at 3737.5,3775.9 h60 r90
  text "E5" at 3948.5,3696.15 h40 r90
  text "NOR" at 3439.5,3692.5 h60 r90
  text "D21" at 3354.5,3684.15 h40 r90
  text "E0" at 3354.5,3594.5 h40 r90
  text "E6" at 3948.5,3593.5 h40 r90
  text "E1" at 3354.5,3497.6 h40 r90
  text "E7" at 3948.5,3496.6 h40 r90
  text "E2" at 3354.5,3397.5 h40 r90
  text "E8" at 3948.5,3396.5 h40 r90
  text "E3" at 3354.5,3296.5 h40 r90
  text "E9" at 3948.5,3295.5 h40 r90
  text "CARD" at 3540.5,3260.5 h60
  text "E4" at 3354.5,3194.5 h40 r90
  text "E10" at 3948.5,3188.5 h40 r90
Bottom Silkscreen Layer:
  text "HPOUT" at 3697.5,3471.5 h40
  text "A0" at 3598.5,3367.5 h40
  text "A1" at 3711.5,3367.5 h40
  text "A3" at 3717.5,3267.5 h40
  text "A2" at 3599.5,3266.5 h40
Document Layer:
  circle w1: c3407.93,3245.26 r74.83
  circle w1: c3856.75,3245.26 r74.8
  circle w1: c3407.93,5096.65 r74.83
  circle w1: c3856.75,5096.65 r74.8